# Altium PCB UAV_mainboard.PcbDoc
Units mm, origin at the board's own origin, x right, y up, seen from the top; angles counter-clockwise.
Board outline 115 x 100.01 mm, 2 copper layers (Top Layer, Bottom Layer); 3 components, 0 nets, 38 pads, 0 vias.
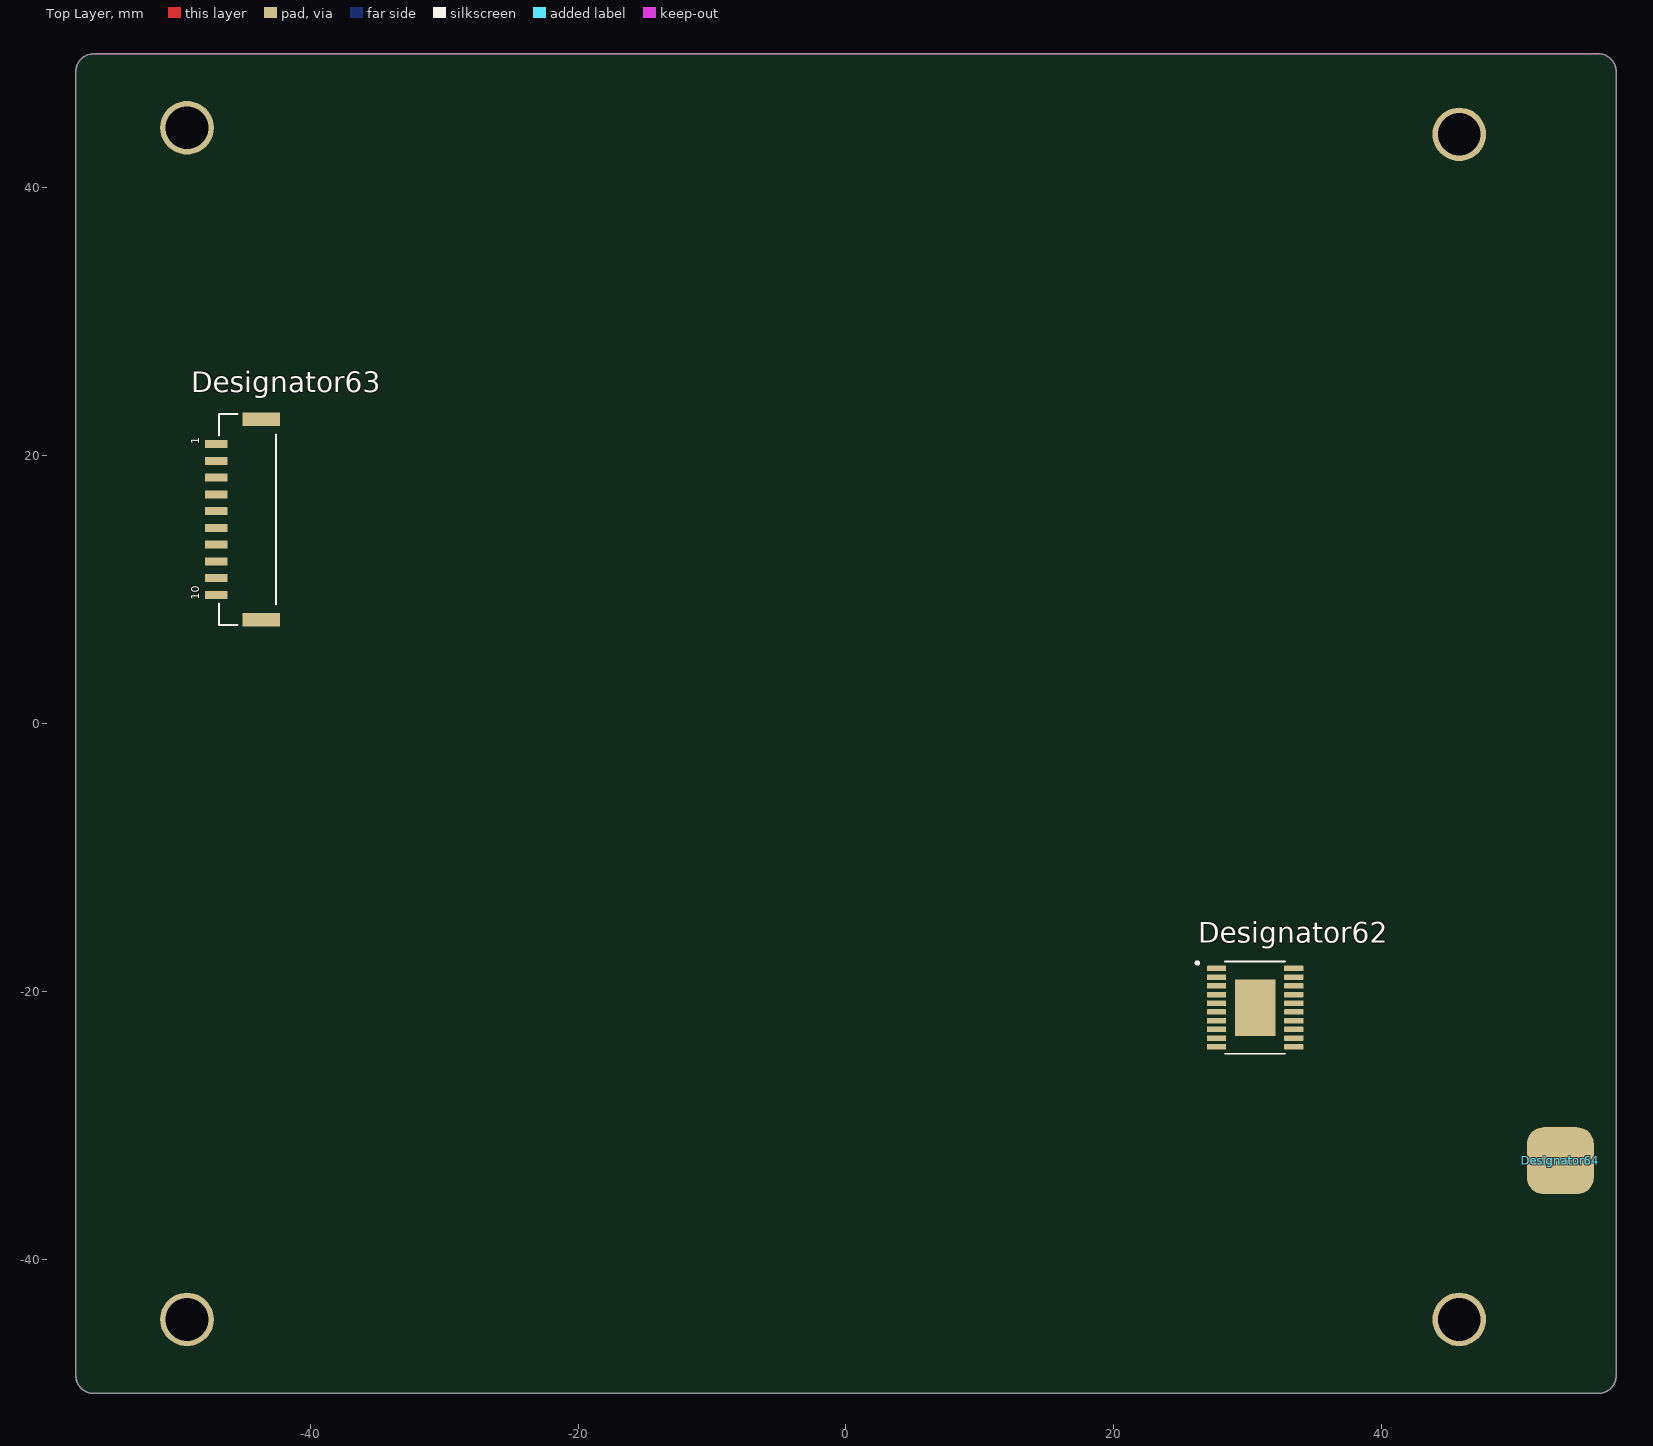
[diagram p0: Top Layer view]
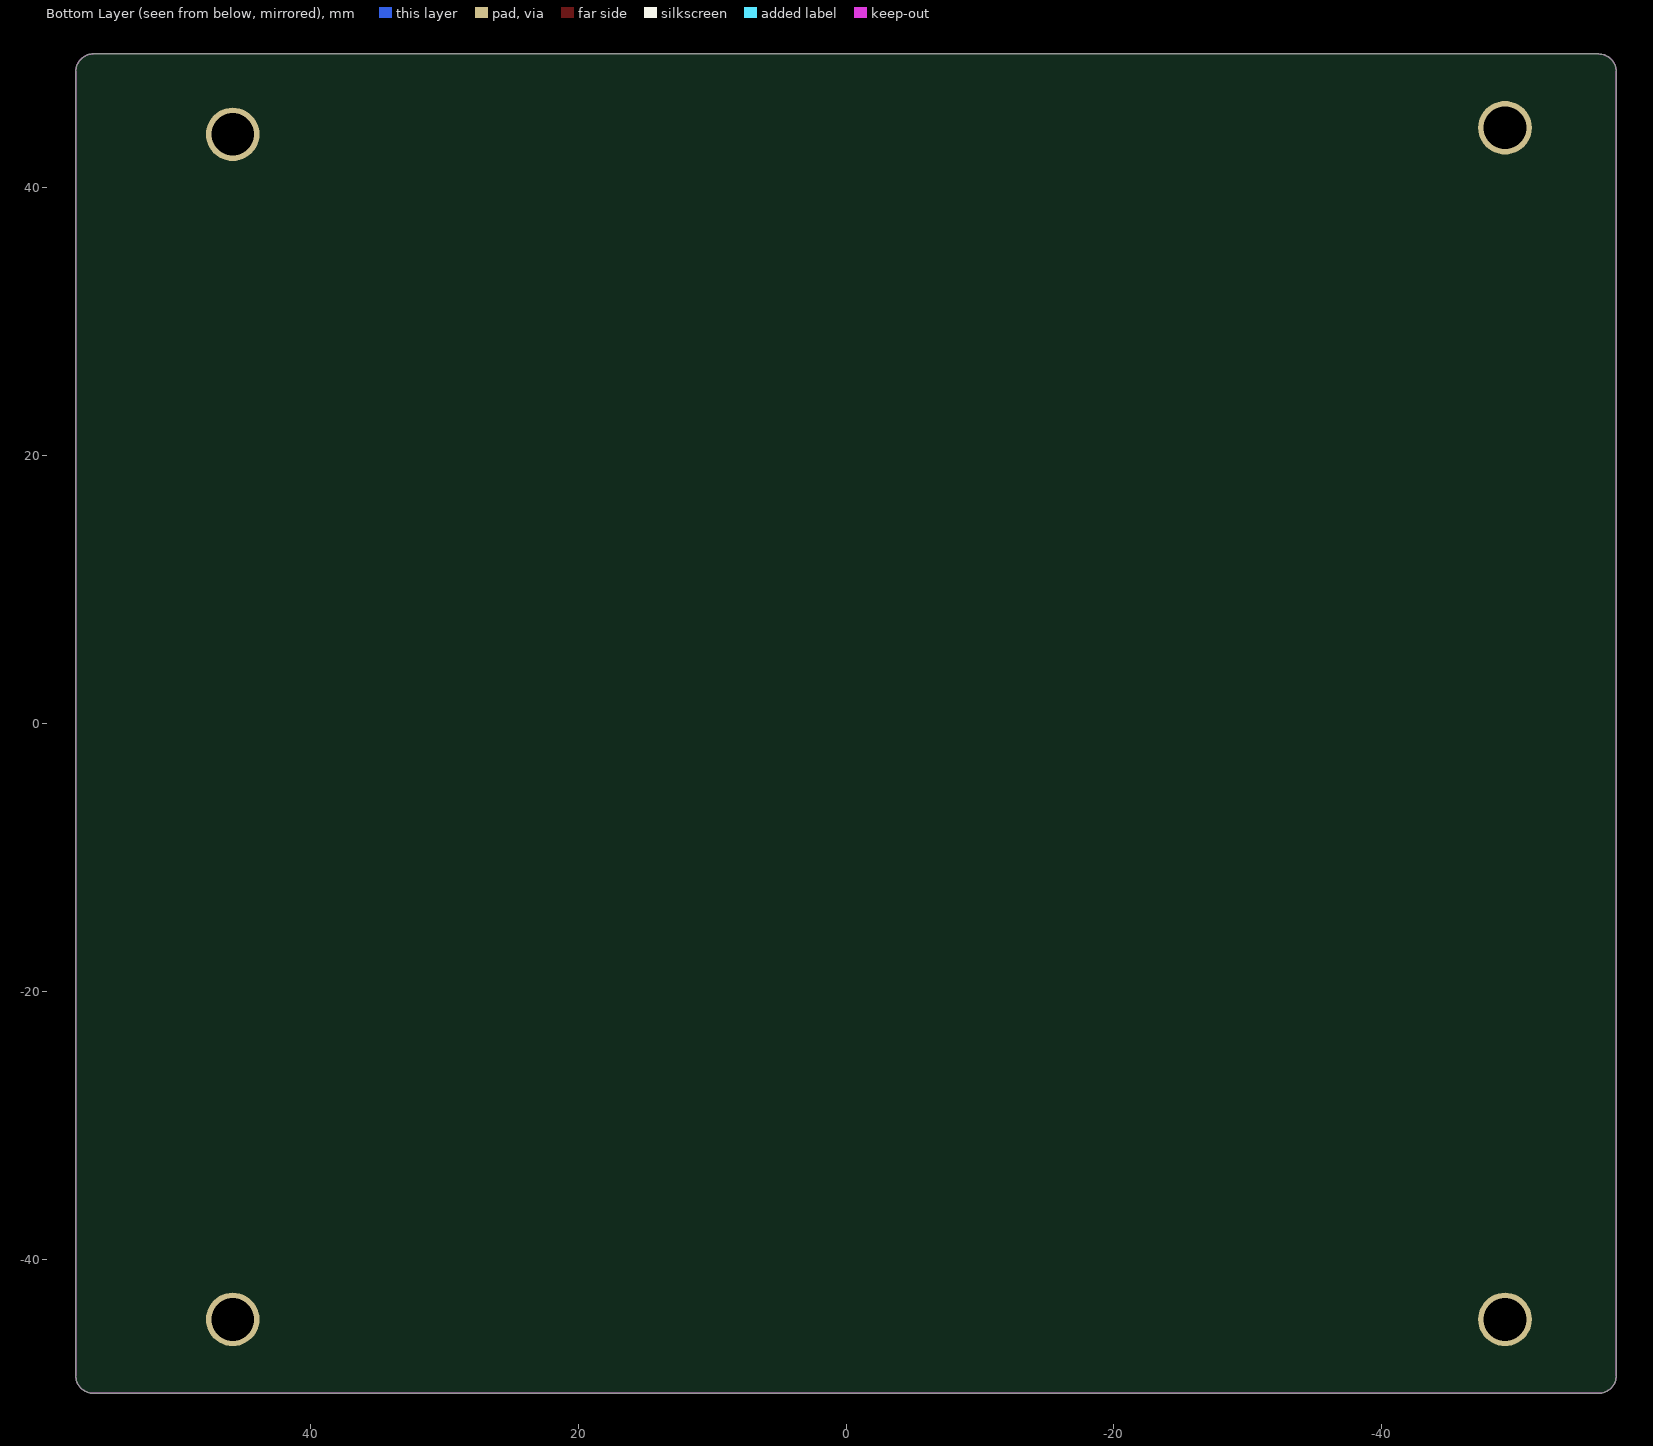
[diagram p1: Bottom Layer view, seen from below]

## Layer stack, top to bottom
Top Solder: solder mask 0.0102, Solder Resist, Dk 3.5
Top Layer: signal copper 0.0356
Dielectric 1: dielectric 0.32, FR-4, Dk 4.8
Bottom Layer: signal copper 0.0356
Bottom Solder: solder mask 0.0102, Solder Resist, Dk 3.5

## Board outline
-57.499,-48.706 -57.499,48.703 cw(c-56.204,48.703) -56.204,49.999 56.202,50.004 cw(c56.202,48.703) 57.502,48.703 57.502,-48.706 cw(c56.207,-48.706) 56.207,-50.001 -56.204,-50.001 cw(c-56.204,-48.706)

## Design rules (kind name [scope] priority, off if disabled: settings)
Clearance [All] p1: gap=0.254 ignorepadtopadclearanceinfootprint=FALSE except(0: Arc-Hole Track-Hole SMDPad-Hole THPad-Hole Via-Hole Fill-Hole Poly-Hole Region-Hole Text-Hole)
PolygonConnect [All] p1: connectstyle=Relief reliefconductorwidth=0.254 reliefentries=4 polygonreliefangle="90 Angle" airgapwidth=0.254
RoutingVias [All] p1: holewidth=0.711 width=1.27 viastyle="Through Hole" minholewidth=0.711 minwidth=1.27 maxholewidth=0.711 maxwidth=1.27
SolderMaskExpansion [All] p1: expansion=0.102 istentingtop=FALSE
Width [All] p1: maxlimit=0.254 minlimit=0.254 preferedwidth=0.254
30 further rules are at their usual default settings.

## Components (designator, comment, footprint, x,y, rotation, side; value= is the part's Value field where it differs from the comment)
Designator62 "Comment" HTSSOP-20 27.686,-18.288 r0 top
Designator63 "Comment" BM10B-GHS-TBT(LF)(SN)(N) -45.339,15.24 r90 top
Designator64 "Comment" "PAD 5x5" 53.34,-32.639 r0 top

## Footprints (in the part's own frame and the unit in brackets; to place one, negate y for a bottom-side part, rotate by r counter-clockwise, add the part's x,y. Pads: shape width x height; smd on the part's side, far side on the other; paste and mask are expansions set on the pad)
BM10B-GHS-TBT(LF)(SN)(N) [mm]
  rect 0.6x1.7 smd: 1(5.625,1.675) 2(4.375,1.675) 3(3.125,1.675) 4(1.875,1.675) 5(0.625,1.675) 6(-0.625,1.675) 7(-1.875,1.675) 8(-3.125,1.675) 9(-4.375,1.675) 10(-5.625,1.675)
  rect 1x2.8 smd: S1(-7.475,-1.675) S2(7.475,-1.675)
  silkscreen extent -7.87,-2.77 7.88,1.48, body extent -7.87,-2.77 7.88,2.18, height 4.2
HTSSOP-20 [mm]
  rrect25% 1.44x0.41 smd: 1(-0.015,0.004) 2(-0.015,-0.646) 3(-0.015,-1.296) 4(-0.015,-1.946) 5(-0.015,-2.596) 6(-0.015,-3.246) 7(-0.015,-3.896) 8(-0.015,-4.546) 9(-0.015,-5.196) 10(-0.015,-5.846) 11(5.755,-5.846) 12(5.755,-5.196) 13(5.755,-4.546) 14(5.755,-3.896) 15(5.755,-3.246) 16(5.755,-2.596) 17(5.755,-1.946) 18(5.755,-1.296) 19(5.755,-0.646) 20(5.755,0.004)
  rect 3x4.2 smd paste-3: 21(2.87,-2.921)
  silkscreen extent -1.55,-6.37 5.12,0.53, body extent -0.33,-6.17 6.07,0.33, height 1.1
"PAD 5x5" [mm]
  rrect50% 5x5 smd: 1(0,0)

## Free pads (board coordinates)
  round 4 hole 3.2: ""(-49.205,-44.49) ""(-49.205,44.49) ""(45.795,-44.49) ""(45.795,44)

## Nets (pads, with @x,y where several pads share a name; then routed paths per layer and width w, separated by ;. In a path a pad name is that pad's centre, name@x,y a point inside that pad or via, vN(x,y) a via of type N, cw(c..) or ccw(c..) an arc to the next point about the centre after c; other vN are vias at no path point)
pads on no net: Designator62.1 Designator62.2 Designator62.3 Designator62.4 Designator62.5 Designator62.6 Designator62.7 Designator62.8 Designator62.9 Designator62.10 Designator62.11 Designator62.12 Designator62.13 Designator62.14 Designator62.15 Designator62.16 Designator62.17 Designator62.18 Designator62.19 Designator62.20 Designator62.21 Designator63.1 Designator63.2 Designator63.3 Designator63.4 Designator63.5 Designator63.6 Designator63.7 Designator63.8 Designator63.9 Designator63.10 Designator63.S1 Designator63.S2 Designator64.1

## Keep-outs
Keep-Out Layer:
  the board outline again, w0.05

## Text inside footprints (layer, text, board x,y; h text height)
Designator63: Top Overlay "1" at -48.289,20.84 h0.61 r90; Top Overlay "10" at -48.289,9.24 h0.61 r90; Mechanical 13 "10" at -48.289,9.24 h0.61 r90; Mechanical 13 "1" at -48.289,20.84 h0.61 r90